# EAGLE board Circuito_lm386 (EAGLE 9.6.2)
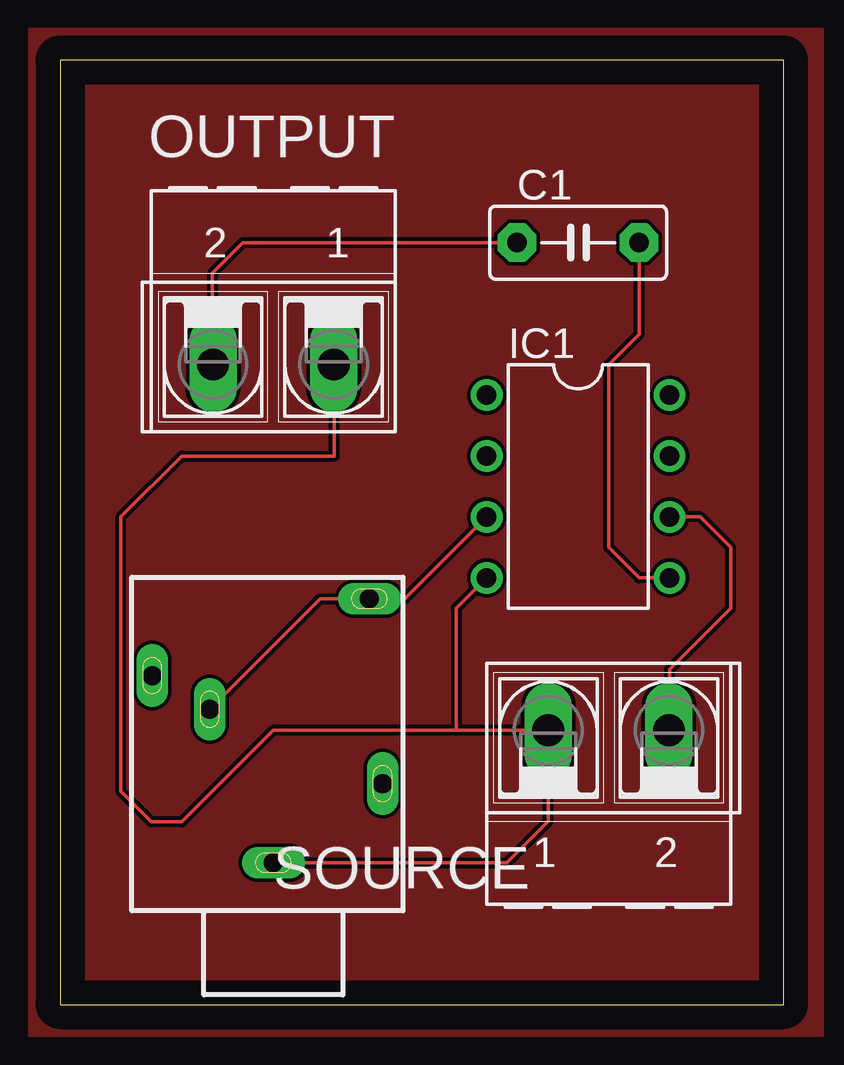
[diagram p0: board, top side]

Size 30.15 x 39.36 mm. Coordinates in mm from the lower left corner, seen from the top.
Outline: 0,0 30.15,0 30.15,39.36 0,39.36 0,0
Copper layers (1*16): Top 0.035mm / dielectric 1.5mm / Bottom 0.035mm
Design rules "default": minimum track width 6mil, minimum drill 0.35mm, track to track 6mil, track to pad 6mil, pad to pad 6mil, via to via 6mil, smd to smd 6mil, copper to edge 40mil, drill to drill 6mil, minimum pad ring 10mil, minimum via ring 8mil, stop-mask expansion 4mil, vias tented up to drill 0mil, thermal gap 10mil

## Footprints (pad centres in the part's own frame; a part is rotated, then mirrored left to right if it is on the bottom)
C5B3 = drill 0.813 pad 1.6 octagon: 1 -2.54,0; 2 2.54,0
DIL08 = drill 0.813 pad 1.27: 1 -3.81,-3.81; 2 -1.27,-3.81; 3 1.27,-3.81; 4 3.81,-3.81; 5 3.81,3.81; 6 1.27,3.81; 7 -1.27,3.81; 8 -3.81,3.81
AK500/2-H = drill 1.321 long: 1 -2.515,0; 2 2.515,0
1503_09 = drill 0.8 pad 1.2 long: 1 0,-2.1; 2 -4.55,-5.4; 3 5.05,-9.9; 4 -4,-13.1; 5 2.65,-8.5

## Placement (x,y rotation side)
C1  220 uF  [C5B3]  21.59,31.75 0 top
IC1  LM386N-1  [DIL08]  21.59,21.59 270 top
OUTPUT  [AK500/2-H]  8.89,26.67 180 top
SOURCE  [AK500/2-H]  22.86,11.43 0 top
X3  1503_09  [1503_09]  8.89,3.81 180 top

## Library data of the parts
C1 = capacitor-wima
IC1 = linear
OUTPUT SOURCE = con-ptr500; OC_FARNELL: unknown; OC_NEWARK: unknown
X3 = con-lumberg; OC_FARNELL: 1243244; OC_NEWARK: unknown

## Nets
N$1: IC1.3 X3.4 X3.5
N$2: IC1.6 SOURCE.2
N$3: IC1.4 OUTPUT.1 SOURCE.1 X3.1
N$4: C1.2 IC1.5
N$5: C1.1 OUTPUT.2

## Tracks (layer width: path | path; a pad name or v marks a point on that pad's centre or on a via)
GND
  pour Top: -1.27,40.64 31.75,40.64 31.75,-1.27 -1.27,-1.27
N$1
  Top 0.152: X3.5 10.84,16.91 X3.4 14.37,16.91 IC1.3
N$2
  Top 0.152: SOURCE.2 25.4,11.46 25.4,13.97 27.94,16.51 27.94,19.05 26.67,20.32 IC1.6
N$3
  Top 0.152: X3.1 18.61,5.91 20.35,7.64 SOURCE.1 16.51,11.43 | OUTPUT.1 11.43,26.64 11.43,22.86 5.08,22.86 2.54,20.32 2.54,8.89 3.81,7.62 5.08,7.62 8.89,11.43 16.51,11.43 | IC1.4 16.51,16.51 16.51,11.43
N$4
  Top 0.152: IC1.5 24.13,17.78 22.86,19.05 22.86,26.67 24.13,27.94 C1.2
N$5
  Top 0.152: C1.1 7.62,31.75 6.35,30.48 6.35,26.7 OUTPUT.2